# Altium PCB RUMBA_V2-bla.PcbDoc (part 2 of 2)
Units mm, origin at the board's own origin, x right, y up, seen from the top; angles counter-clockwise.
Board outline 145 x 75 mm, 2 copper layers (Top Layer, Bottom Layer); 189 components, 179 nets, 824 pads, 160 vias.
Unrouted connection lines stored in the file: 201.
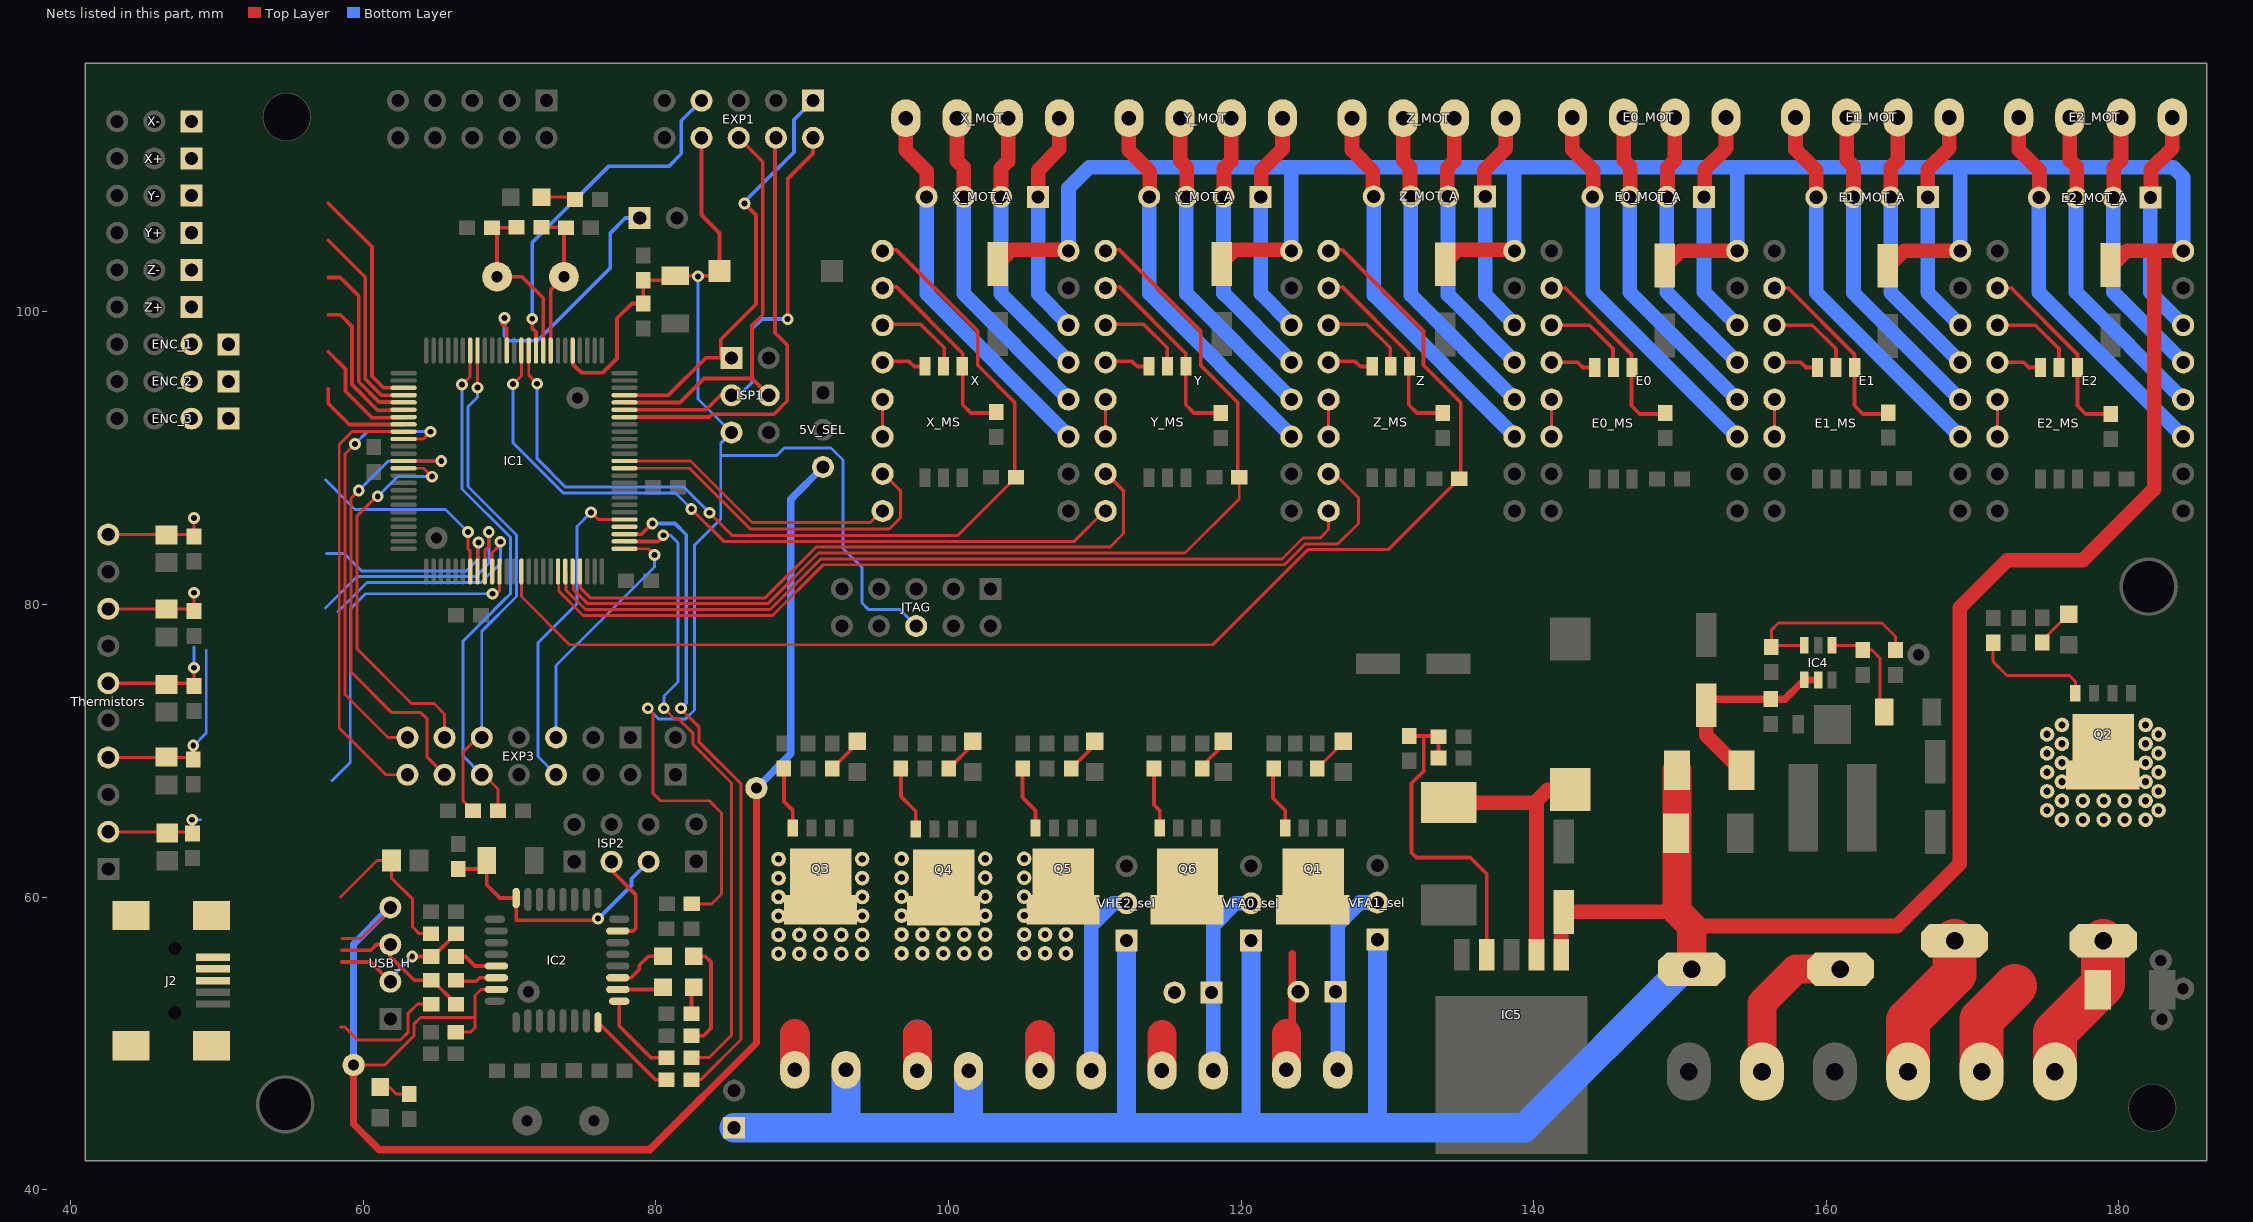
[diagram p2: the nets of this part, all layers, seen from the top]

## Via types
v1: diameter 0.8, hole 0.4, Top Layer to Bottom Layer, tented both sides, 160 vias

## Nets (pads, with @x,y where several pads share a name; then routed paths per layer and width w, separated by ;. In a path a pad name is that pad's centre, name@x,y a point inside that pad or via, vN(x,y) a via of type N, cw(c..) or ccw(c..) an arc to the next point about the centre after c; other vN are vias at no path point) (continued)
NetC18_2: C18.2 D4.2 IC4.1 | length 7.6
  Top Layer w0.2: IC4.1@160.39,77.219 162.163,77.219 C18.2@162.488,76.894 163.111,76.894 163.657,76.348 163.657,73.123 D4.2@164.165,72.615
NetC19_2: C19.2 IC1.33 R1.2 Y1.2 | length 10.5
  Top Layer w0.254: R1.2@72.178,105.782 C19.2@73.563,105.782 ; IC1.33@72.81,97.367 72.81,101.498 Y1.2@73.716,102.404 73.716,105.629 C19.2@73.563,105.782 ; C19.2@73.819,105.782 C19.2@73.563,105.782
NetC20_2: C20.2 IC1.34 R1.1 Y1.1 | length 12.4
  Top Layer w0.254: C20.2@68.799,105.752 C20.2@69.092,105.752 ; R1.1@70.448,105.752 C20.2@69.092,105.752 ; IC1.34@72.31,97.367 72.31,100.95 70.856,102.404 Y1.1@69.144,102.404 69.144,105.701 C20.2@69.092,105.752
NetC33_2: C33.2 IC5.4 R56.1 R57.1 | length 22.9
  Top Layer w0.254: R56.1@131.5,71.026 R57.1@133.433,71.026 ; 132.491,70.964 132.491,68.627 131.653,67.789 131.653,63.039 131.983,62.709 135.666,62.709 136.786,61.588 IC5.4@136.786,56.074 ; C33.2@133.496,69.516 R57.1@133.496,70.964
NetD8_2: D8.2 IC5.2 L4.1 | length 19.2
  Top Layer w0.254: 140.08,66.463 140.186,66.568
  Top Layer w1: D8.2@134.193,66.463 140.08,66.463 ; IC5.2@140.186,56.074 140.186,66.568 140.974,67.357 L4.1@142.498,67.357
NetE0_2: E0.2 E0_MS.1 R28.1 | length 13.4
  Top Layer w0.2: E0.2@141.211,101.636 142.153,101.636
  Top Layer w0.254: 142.153,101.636 146.688,97.102 146.688,96.204 146.688,93.596 147.252,93.032 R28.1@148.967,93.032
NetE0_3: E0.3 E0_MS.2 | length 6.2
  Top Layer w0.254: E0.3@141.211,99.096 143.804,99.096 145.418,97.483 E0_MS.2@145.418,96.204
NetE0_4: E0.4 E0_MS.3 | length 3.1
  Top Layer w0.254: E0.4@141.211,96.556 143.017,96.556 143.37,96.204 E0_MS.3@144.148,96.204
NetE0_5: E0.5 E0.6 | length 2.5
  Top Layer w0.2: E0.6@141.211,91.476 E0.5@141.211,94.016
NetE0_11: E0.11 E0_MOT.1 E0_MOT_A.4 | length 26.5
  Top Layer w1: E0_MOT.1@142.643,113.295 142.643,111.098 144.068,109.673 E0_MOT_A.4@144.068,107.921
  Bottom Layer w1: E0_MOT_A.4@144.022,107.87 144.022,101.365 E0.11@153.911,91.476
NetE0_12: E0.12 E0_MOT.2 E0_MOT_A.3 | length 22.5
  Top Layer w1: E0_MOT.2@146.143,113.295 146.143,110.392 146.608,109.927 E0_MOT_A.3@146.608,107.921
  Bottom Layer w1: E0_MOT_A.3@146.562,107.87 146.562,101.365 E0.12@153.911,94.016
NetE0_13: E0.13 E0_MOT.3 E0_MOT_A.2 | length 18.9
  Top Layer w1: E0_MOT_A.2@149.148,107.921 149.148,109.876 149.643,110.372 E0_MOT.3@149.643,113.295
  Bottom Layer w1: E0_MOT_A.2@149.102,107.87 149.102,101.365 E0.13@153.911,96.556
NetE0_14: E0.14 E0_MOT.4 E0_MOT_A.1 | length 15.7
  Top Layer w1: E0_MOT_A.1@151.688,107.921 151.688,109.749 153.143,111.205 E0_MOT.4@153.143,113.295
  Bottom Layer w1: E0_MOT_A.1@151.642,107.87 151.642,101.365 E0.14@153.911,99.096
NetE1_2: E1.2 E1_MS.1 R30.1 | length 13.4
  Top Layer w0.2: E1.2@156.451,101.636 157.393,101.636
  Top Layer w0.254: 157.393,101.636 161.928,97.102 161.928,96.204 161.928,93.596 162.492,93.032 R30.1@164.207,93.032
NetE1_3: E1.3 E1_MS.2 | length 6.2
  Top Layer w0.254: E1.3@156.451,99.096 159.044,99.096 160.658,97.483 E1_MS.2@160.658,96.204
NetE1_4: E1.4 E1_MS.3 | length 3.1
  Top Layer w0.254: E1.4@156.451,96.556 158.257,96.556 158.61,96.204 E1_MS.3@159.388,96.204
NetE1_5: E1.5 E1.6 | length 2.5
  Top Layer w0.2: E1.6@156.451,91.476 E1.5@156.451,94.016
NetE1_11: E1.11 E1_MOT.1 E1_MOT_A.4 | length 26.4
  Top Layer w1: E1_MOT.1@157.893,113.295 157.893,111.098 159.318,109.673 E1_MOT_A.4@159.318,107.921
  Bottom Layer w1: E1_MOT_A.4@159.313,107.844 159.313,101.314 E1.11@169.151,91.476
NetE1_12: E1.12 E1_MOT.2 E1_MOT_A.3 | length 22.4
  Top Layer w1: E1_MOT.2@161.393,113.295 161.393,110.392 161.858,109.927 E1_MOT_A.3@161.858,107.921
  Bottom Layer w1: E1_MOT_A.3@161.853,107.844 161.853,101.314 E1.12@169.151,94.016
NetE1_13: E1.13 E1_MOT.3 E1_MOT_A.2 | length 18.8
  Top Layer w1: E1_MOT_A.2@164.398,107.921 164.398,109.876 164.893,110.372 E1_MOT.3@164.893,113.295
  Bottom Layer w1: E1_MOT_A.2@164.393,107.844 164.393,101.314 E1.13@169.151,96.556
NetE1_14: E1.14 E1_MOT.4 E1_MOT_A.1 | length 15.6
  Top Layer w1: E1_MOT_A.1@166.938,107.921 166.938,109.749 168.393,111.205 E1_MOT.4@168.393,113.295
  Bottom Layer w1: E1_MOT_A.1@166.933,107.844 166.933,101.314 E1.14@169.151,99.096
NetE2_2: E2.2 E2_MS.1 R44.1 | length 13.4
  Top Layer w0.2: E2.2@171.691,101.636 172.633,101.636
  Top Layer w0.254: 172.633,101.636 177.168,97.102 E2_MS.1@177.168,96.204 177.168,93.596 177.732,93.032 R44.1@179.447,93.032
NetE2_3: E2.3 E2_MS.2 | length 6.2
  Top Layer w0.254: E2.3@171.691,99.096 174.284,99.096 175.898,97.483 E2_MS.2@175.898,96.204
NetE2_4: E2.4 E2_MS.3 | length 3.1
  Top Layer w0.254: E2.4@171.691,96.556 173.497,96.556 173.85,96.204 E2_MS.3@174.628,96.204
NetE2_5: E2.5 E2.6 | length 2.5
  Top Layer w0.2: E2.6@171.691,91.476 E2.5@171.691,94.016
NetE2_11: E2.11 E2_MOT.1 E2_MOT_A.4 | length 26.4
  Top Layer w1: E2_MOT.1@173.143,113.295 173.143,111.098 174.568,109.673 E2_MOT_A.4@174.568,107.921
  Bottom Layer w1: E2_MOT_A.4@174.528,107.819 174.528,101.339 E2.11@184.391,91.476
NetE2_12: E2.12 E2_MOT.2 E2_MOT_A.3 | length 22.4
  Top Layer w1: E2_MOT.2@176.643,113.295 176.643,110.392 177.108,109.927 E2_MOT_A.3@177.108,107.921
  Bottom Layer w1: E2_MOT_A.3@177.068,107.819 177.068,101.339 E2.12@184.391,94.016
NetE2_13: E2.13 E2_MOT.3 E2_MOT_A.2 | length 18.8
  Top Layer w1: E2_MOT_A.2@179.648,107.921 179.648,109.876 180.143,110.372 E2_MOT.3@180.143,113.295
  Bottom Layer w1: E2_MOT_A.2@179.608,107.819 179.608,101.339 E2.13@184.391,96.556
NetE2_14: E2.14 E2_MOT.4 E2_MOT_A.1 | length 15.6
  Top Layer w1: E2_MOT_A.1@182.188,107.921 182.188,109.749 183.643,111.205 E2_MOT.4@183.643,113.295
  Bottom Layer w1: E2_MOT_A.1@182.148,107.819 182.148,101.339 E2.14@184.391,99.096
NetF1_1: F1.1 HB-PWR.2 | length 10.3
  Top Layer w3: HB-PWR.2@165.583,48.078 165.583,51.58 168.762,54.758 F1.1@168.762,57.019
NetF2_1: F2.1 MAIN-PWR.2 | length 11
  Top Layer w2: MAIN-PWR.2@155.601,48.078 155.601,52.773 157.916,55.089 F2.1@160.964,55.089
NetFAN0_1: FAN0.1 FAN0_1.1 VFA0_sel.2 | length 13
  Bottom Layer w1: FAN0.1@118.089,48.154 118.089,58.06 119.613,59.584 VFA0_sel.2@120.502,59.584
NetFAN0_2: FAN0.2 FAN0_1.2 Q6.2 | length 2.5
  Top Layer w2: FAN0.2@114.589,48.154 114.589,50.623
NetFAN1_1: FAN1.1 FAN1_1.1 VFA1_sel.2 | length 13
  Bottom Layer w1: FAN1.1@126.598,48.205 126.598,58.111 128.122,59.635 VFA1_sel.2@129.011,59.635
NetFAN1_2: FAN1.2 FAN1_1.2 Q1.2 | length 8.1
  Top Layer w0.5: 123.098,50.674 123.493,51.069 123.493,56.155
  Top Layer w2: FAN1.2@123.098,48.205 123.098,50.674
NetHB-OUT_1: HB-OUT.1 pad.2@175.087,65.934 pad.2@175.087,67.236 pad.2@175.087,68.538 pad.2@175.087,69.84 pad.2@175.087,71.141 pad.2@176.103,65.299 pad.2@176.103,66.595 pad.2@176.103,67.89 pad.2@176.103,69.186 pad.2@176.103,70.481 pad.2@176.103,71.776 pad.2@177.531,65.299 pad.2@177.531,66.595 pad.2@178.96,65.299 pad.2@178.96,66.595 pad.2@180.389,65.299 pad.2@180.389,66.595 pad.2@181.818,65.299 pad.2@181.818,66.595 pad.2@181.818,67.89 pad.2@181.818,69.186 pad.2@181.818,70.481 pad.2@181.818,71.776 pad.2@182.707,65.934 pad.2@182.707,67.236 pad.2@182.707,68.538 pad.2@182.707,69.84 pad.2@182.707,71.141 Q2.2 | length 6.8
  Top Layer w3: HB-OUT.1@170.616,48.078 170.616,51.634 172.902,53.92
NetHE0_2: HE0.2 pad.2@88.384,56.13 pad.2@88.384,57.425 pad.2@88.384,58.721 pad.2@88.384,60.016 pad.2@88.384,61.312 pad.2@88.384,62.607 pad.2@89.812,56.13 pad.2@89.812,57.425 pad.2@91.241,56.13 pad.2@91.241,57.425 pad.2@92.67,56.13 pad.2@92.67,57.425 pad.2@94.099,56.13 pad.2@94.099,57.425 pad.2@94.099,58.721 pad.2@94.099,60.016 pad.2@94.099,61.312 pad.2@94.099,62.607 Q3.2 | length 4.9
  Top Layer w2: HE0.2@89.494,48.205 89.494,50.674
  Bottom Layer w2: HE0.2@89.494,48.205 89.494,50.613
NetHE1_2: HE1.2 pad.2@96.791,56.155 pad.2@96.791,57.451 pad.2@96.791,58.746 pad.2@96.791,60.042 pad.2@96.791,61.337 pad.2@96.791,62.632 pad.2@98.22,56.155 pad.2@98.22,57.451 pad.2@99.649,56.155 pad.2@99.649,57.451 pad.2@101.077,56.155 pad.2@101.077,57.451 pad.2@102.506,56.155 pad.2@102.506,57.451 pad.2@102.506,58.746 pad.2@102.506,60.042 pad.2@102.506,61.337 pad.2@102.506,62.632 Q4.2 | length 5
  Top Layer w2: HE1.2@97.876,48.129 97.876,50.598
  Bottom Layer w2: HE1.2@97.876,48.129 97.876,50.638
NetHE2_1: HE2.1 VHE2_sel.2 | length 13
  Bottom Layer w1: HE2.1@109.758,48.154 109.758,58.06 111.282,59.584 VHE2_sel.2@112.171,59.584
NetHE2_2: HE2.2 pad.2@105.173,56.155 pad.2@105.173,57.451 pad.2@105.173,58.746 pad.2@105.173,60.042 pad.2@105.173,61.337 pad.2@105.173,62.632 pad.2@106.602,56.155 pad.2@106.602,57.451 pad.2@108.031,56.155 pad.2@108.031,57.451 Q5.2 | length 4.9
  Top Layer w2: HE2.2@106.258,48.154 106.258,50.623
  Bottom Layer w2: HE2.2@106.258,48.154 106.258,50.573
NetIC2_8: IC2.8 R17.1 | length 6.3
  Top Layer w0.254: IC2.8@76.048,51.447 76.055,51.447 79.97,47.531 R17.1@80.734,47.531
NetIC2_9: IC2.9 R18.1 | length 5.8
  Top Layer w0.254: IC2.9@77.498,52.897 77.498,51.204 79.671,49.031 R18.1@80.734,49.031
NetIC2_10: IC2.10 RX.2 | length 3.2
  Top Layer w0.254: IC2.10@77.398,53.697 80.329,53.697 RX.2@80.489,53.857
NetIC2_11: IC2.11 TX.2 | length 3.9
  Top Layer w0.254: IC2.11@77.398,54.497 78.305,54.497 78.871,55.063 78.871,55.343 79.494,55.966 TX.2@80.489,55.966
NetIC2_29: IC2.29 R8.1 | length 3
  Top Layer w0.254: R8.1@66.348,55.947 66.99,55.947 67.64,55.297 IC2.29@69.098,55.297
NetIC2_30: IC2.30 R7.1 | length 2.9
  Top Layer w0.254: R7.1@66.348,54.324 66.421,54.25 67.721,54.25 67.967,54.497 IC2.30@69.098,54.497
NetIC4_3: IC4.3 R5.1 R6.2 | length 13.4
  Top Layer w0.2: R6.2@156.24,77.097 156.24,78.253 156.722,78.736 163.809,78.736 164.723,77.822 R5.1@164.723,76.894 ; R6.2@156.362,77.219 IC4.3@158.49,77.219
  Top Layer w0.5: R6.2@156.24,77.097 R6.2@156.362,77.219
NetJ2_0: J2.0 L1.1 Z1.2 Z2.2 | length 19.4
  Top Layer w0.2: 58.453,51.121 58.734,51.121 59.618,50.237 62.539,50.237 63.073,50.771 63.073,52.066 63.703,52.697 Z1.2@64.648,52.697 ; 58.453,60.021 60.937,62.505 L1.1@61.919,62.505 61.919,61.322 63.377,59.864 63.377,57.959 63.828,57.508 Z2.2@64.638,57.508
NetJ2_2: J2.2 R7.2 USB_H.3 Z1.1 | length 10.1
  Top Layer w0.254: 58.553,56.371 60.52,56.371 60.914,56.765 USB_H.3@61.853,56.765 61.853,55.952 63.482,54.324 R7.2@64.648,54.324 64.721,54.324 Z1.1@66.348,52.697
NetJ2_3: J2.3 R8.2 USB_H.2 Z2.1 | length 9.8
  Top Layer w0.254: 58.553,55.571 60.507,55.571 USB_H.2@61.853,54.225 ; v1(63.346,55.947) R8.2@64.648,55.947 64.776,55.947 Z2.1@66.338,57.508
  Bottom Layer w0.254: USB_H.2@61.853,54.225 61.853,54.454 v1(63.346,55.947)
NetLD2_1: LD2.1 R33.2 | length 2.7
  Top Layer w0.2: R33.2@174.756,77.403 174.756,77.542 LD2.1@176.56,79.346
NetLD3_1: LD3.1 R36.2 | length 2.6
  Top Layer w0.254: R36.2@92.053,68.793 93.756,70.496 LD3.1@93.756,70.659
NetLD4_1: LD4.1 R39.2 | length 2.5
  Top Layer w0.254: R39.2@100.029,68.793 101.658,70.422 LD4.1@101.658,70.659
NetLD5_1: LD5.1 R50.2 | length 2.5
  Top Layer w0.254: R50.2@108.386,68.793 109.99,70.397 LD5.1@109.99,70.659
NetLD6_1: LD6.1 R53.2 | length 2.5
  Top Layer w0.254: R53.2@117.352,68.793 117.352,68.98 118.778,70.406 LD6.1@118.778,70.659
NetLD7_1: LD7.1 R55.2 | length 2.6
  Top Layer w0.2: R55.2@125.201,68.793 LD7.1@126.979,70.571
  Top Layer w0.5: LD7.1@126.979,70.571 LD7.1@126.979,70.659
NetLED1_1: LED1.1 R13.1 | length 2.1
  Top Layer w0.2: LED1.1@72.183,107.844 R13.1@74.33,107.844
NetPower_1: Power.1 R4.1 | length 2.2
  Top Layer w0.2: Power.1@61.168,47.029 61.785,47.029 62.273,46.541 R4.1@63.149,46.541
NetQ1_1: Q1.1 R46.2 | length 4.5
  Top Layer w0.254: R46.2@122.404,68.793 122.178,68.568 122.178,66.77 123.017,65.932 Q1.1@123.017,64.727
NetQ2_1: Q2.1 R31.2 | length 8.3
  Top Layer w0.2: R31.2@171.404,77.392 171.404,76.094 172.343,75.155 176.611,75.155 177.017,74.748 Q2.1@177.017,73.935
NetQ3_1: Q3.1 R34.2 | length 4.3
  Top Layer w0.254: R34.2@88.751,68.793 88.751,66.545 89.364,65.932 Q3.1@89.364,64.727
NetQ4_1: Q4.1 R37.2 | length 4.7
  Top Layer w0.254: R37.2@97.156,68.73 96.753,68.327 96.753,66.885 97.769,65.869 Q4.1@97.769,64.664
NetQ5_1: Q5.1 R48.2 | length 4.5
  Top Layer w0.254: R48.2@105.336,68.793 105.059,68.516 105.059,66.822 105.949,65.932 Q5.1@105.949,64.727
NetQ6_1: Q6.1 R51.2 | length 4.3
  Top Layer w0.254: R51.2@113.819,68.793 114.05,68.561 114.05,66.313 114.432,65.932 Q6.1@114.432,64.727
NetR15_2: R15.2 TX.1 | length 7.4
  Top Layer w0.254: R15.2@82.434,50.531 83.254,50.531 83.774,51.05 83.774,55.571 83.379,55.966 TX.1@82.589,55.966
NetR16_2: R16.2 RX.1 | length 1.7
  Top Layer w0.254: R16.2@82.434,52.031 RX.1@82.434,53.702
NetR22_1: R22.1 X.2 X_MS.1 | length 13.4
  Top Layer w0.2: X.2@95.499,101.705 96.442,101.705
  Top Layer w0.254: 96.442,101.705 100.976,97.17 100.976,96.272 100.976,93.665 101.541,93.101 R22.1@103.255,93.101
NetR24_1: R24.1 Y.2 Y_MS.1 | length 13.4
  Top Layer w0.2: Y.2@110.739,101.705 111.682,101.705
  Top Layer w0.254: 111.682,101.705 116.216,97.17 116.216,96.272 116.216,93.665 116.781,93.101 R24.1@118.495,93.101
NetR26_1: R26.1 Z.2 Z_MS.1 | length 13.4
  Top Layer w0.2: Z.2@125.979,101.705 126.922,101.705
  Top Layer w0.254: 126.922,101.705 131.456,97.17 131.456,96.272 131.456,93.665 132.021,93.101 R26.1@133.735,93.101
NetX_3: X.3 X_MS.2 | length 6.2
  Top Layer w0.254: X.3@95.499,99.165 98.093,99.165 99.706,97.551 X_MS.2@99.706,96.272
NetX_4: X.4 X_MS.3 | length 3.1
  Top Layer w0.254: X.4@95.499,96.625 97.305,96.625 97.658,96.272 X_MS.3@98.436,96.272
NetX_5: X.5 X.6 | length 2.5
  Top Layer w0.2: X.6@95.499,91.545 X.5@95.499,94.085
NetX_11: X.11 X_MOT.1 X_MOT_A.4 | length 26.3
  Top Layer w1: X_MOT.1@97.081,113.244 97.081,111.047 98.506,109.622 X_MOT_A.4@98.506,107.87
  Bottom Layer w1: X_MOT_A.4@98.506,107.87 98.506,101.238 X.11@108.199,91.545
NetX_12: X.12 X_MOT.2 X_MOT_A.3 | length 22.3
  Top Layer w1: X_MOT.2@100.581,113.244 100.581,110.341 101.046,109.876 X_MOT_A.3@101.046,107.87
  Bottom Layer w1: X_MOT_A.3@101.046,107.87 101.046,101.238 X.12@108.199,94.085
NetX_13: X.13 X_MOT.3 X_MOT_A.2 | length 18.7
  Top Layer w1: X_MOT_A.2@103.586,107.87 103.586,109.826 104.081,110.321 X_MOT.3@104.081,113.244
  Bottom Layer w1: X_MOT_A.2@103.586,107.87 103.586,101.238 X.13@108.199,96.625
NetX_14: X.14 X_MOT.4 X_MOT_A.1 | length 15.5
  Top Layer w1: X_MOT_A.1@106.126,107.87 106.126,109.699 107.581,111.154 X_MOT.4@107.581,113.244
  Bottom Layer w1: X_MOT_A.1@106.126,107.87 106.126,101.238 X.14@108.199,99.165
NetY_3: Y.3 Y_MS.2 | length 6.2
  Top Layer w0.254: Y.3@110.739,99.165 113.333,99.165 114.946,97.551 Y_MS.2@114.946,96.272
NetY_4: Y.4 Y_MS.3 | length 3.1
  Top Layer w0.254: Y.4@110.739,96.625 112.545,96.625 112.898,96.272 Y_MS.3@113.676,96.272
NetY_5: Y.5 Y.6 | length 2.5
  Top Layer w0.2: Y.6@110.739,91.545 Y.5@110.739,94.085
NetY_11: Y.11 Y_MOT.1 Y_MOT_A.4 | length 28.1
  Top Layer w1: Y_MOT.1@112.331,113.244 112.331,111.047 113.756,109.622 ; 113.756,109.622 113.756,107.87 113.756,109.622
  Bottom Layer w1: Y_MOT_A.4@113.72,107.87 113.72,101.264 Y.11@123.439,91.545
NetY_12: Y.12 Y_MOT.2 Y_MOT_A.3 | length 24.3
  Top Layer w1: Y_MOT.2@115.831,113.244 115.831,110.341 116.296,109.876 ; 116.296,109.876 116.296,107.87 116.296,109.876
  Bottom Layer w1: Y_MOT_A.3@116.26,107.87 116.26,101.264 Y.12@123.439,94.085
NetY_13: Y.13 Y_MOT.3 Y_MOT_A.2 | length 20.7
  Top Layer w1: Y_MOT.3@119.331,113.244 119.331,110.321 118.836,109.826 ; 118.836,109.826 118.836,107.87 118.836,109.826
  Bottom Layer w1: Y_MOT_A.2@118.8,107.87 118.8,101.264 Y.13@123.439,96.625
NetY_14: Y.14 Y_MOT.4 Y_MOT_A.1 | length 17.4
  Top Layer w1: Y_MOT.4@122.831,113.244 122.831,111.154 121.376,109.699 ; 121.376,109.699 121.376,107.87 121.376,109.699
  Bottom Layer w1: Y_MOT_A.1@121.34,107.87 121.34,101.264 Y.14@123.439,99.165
NetZ_3: Z.3 Z_MS.2 | length 6.2
  Top Layer w0.254: Z.3@125.979,99.165 128.573,99.165 130.186,97.551 Z_MS.2@130.186,96.272
NetZ_4: Z.4 Z_MS.3 | length 3.1
  Top Layer w0.254: Z.4@125.979,96.625 127.785,96.625 128.138,96.272 Z_MS.3@128.916,96.272
NetZ_5: Z.5 Z.6 | length 2.5
  Top Layer w0.2: Z.6@125.979,91.545 Z.5@125.979,94.085
NetZ_11: Z.11 Z_MOT.1 Z_MOT_A.4 | length 28.1
  Top Layer w1: Z_MOT.1@127.581,113.244 127.581,111.047 129.006,109.622 ; 129.006,109.622 129.006,107.87 129.006,107.895 129.006,109.622
  Bottom Layer w1: Z_MOT_A.4@129.062,107.895 129.062,101.162 Z.11@138.679,91.545
NetZ_12: Z.12 Z_MOT.2 Z_MOT_A.3 | length 24.3
  Top Layer w1: Z_MOT.2@131.081,113.244 131.081,110.341 131.546,109.876 ; 131.546,109.876 131.546,107.87 131.546,107.895 131.546,109.876
  Bottom Layer w1: Z_MOT_A.3@131.602,107.895 131.602,101.162 Z.12@138.679,94.085
NetZ_13: Z.13 Z_MOT.3 Z_MOT_A.2 | length 20.7
  Top Layer w1: Z_MOT.3@134.581,113.244 134.581,110.321 134.086,109.826 ; 134.086,109.826 134.086,107.87 134.086,107.895 134.086,109.826
  Bottom Layer w1: Z_MOT_A.2@134.142,107.895 134.142,101.162 Z.13@138.679,96.625
NetZ_14: Z.14 Z_MOT.4 Z_MOT_A.1 | length 17.4
  Top Layer w1: Z_MOT.4@138.081,113.244 138.081,111.154 136.626,109.699 ; 136.626,109.699 136.626,107.87 136.626,107.895 136.626,109.699
  Bottom Layer w1: Z_MOT_A.1@136.682,107.895 136.682,101.162 Z.14@138.679,99.165
PB1_(SCK): EXP1.2 IC1.20 ISP1.3 | length 28.2
  Top Layer w0.254: IC1.20@77.86,93.317 83.419,93.317 ISP1.3@84.434,94.332 ; v1(89.006,99.513) 89.006,109.089 90.743,110.826 EXP1.2@90.743,111.904
  Bottom Layer w0.254: ISP1.3@85.171,94.306 85.704,94.306 86.593,95.195 86.593,98.853 87.253,99.513 v1(89.006,99.513)
PB2_(MOSI): EXP1.6 IC1.21 ISP1.4 | length 28.4
  Top Layer w0.254: IC1.21@77.86,93.817 81.659,93.817 83.291,95.449 86.568,95.449 ; EXP1.6@85.663,111.904 87.304,110.262 87.304,99.818 86.568,99.081 86.568,95.449 ; ISP1.4@87.711,94.306 86.568,95.449
PB3_(MISO): EXP1.1 IC1.22 ISP1.1 | length 28.5
  Top Layer w0.254: IC1.22@77.86,94.317 80.863,94.317 83.418,96.872 84.434,96.872 84.434,98.116 86.847,100.529 86.847,106.625 v1(86.06,107.413)
  Bottom Layer w0.254: v1(86.06,107.413) 86.06,107.54 89.438,110.918 89.438,113.139 EXP1.1@90.743,114.444
PC6: EXP3.14 IC1.59 | length 30.5
  Top Layer w0.2: 58.983,91.563 58.729,91.309 ; IC1.59@62.76,91.817 59.237,91.817 58.729,91.309 ; EXP3.14@63.022,68.373 61.549,68.373 58.36,71.561 58.36,90.94 58.729,91.309
PC7: EXP3.13 IC1.60 | length 30.4
  Top Layer w0.2: v1(59.44,90.979) 58.76,90.298 58.76,77.237 58.76,73.854 61.701,70.913 EXP3.13@63.022,70.913 ; IC1.60@62.76,91.317 64.097,91.317 v1(64.597,91.817)
  Bottom Layer w0.2: v1(59.44,90.979) 60.279,91.817 v1(64.597,91.817)
PJ0: EXP3.12 IC1.63 | length 33.3
  Top Layer w0.2: v1(59.694,87.804) 59.16,87.269 59.16,75.41 61.955,72.615 62.59,72.615 ; IC1.63@62.76,89.817 v1(65.327,89.817) ; 63.377,72.615 62.59,72.615 ; EXP3.12@65.562,68.373 64.368,69.567 64.368,72.183 63.936,72.615 62.59,72.615
  Bottom Layer w0.2: v1(59.694,87.804) 61.708,89.817 v1(65.327,89.817)
PJ1: EXP3.11 IC1.64 | length 27.1
  Top Layer w0.2: v1(60.99,87.397) 60.99,87.169 60.685,87.169 59.56,86.044 59.56,76.991 63.303,73.248 64.827,73.248 65.562,72.513 EXP3.11@65.562,70.913 ; IC1.64@62.76,89.317 64.125,89.317 v1(64.698,88.744)
  Bottom Layer w0.2: v1(60.99,87.397) 62.336,88.744 v1(64.698,88.744)
PS_ON: IC1.39 PS_ON.1 | length 17.9
  Top Layer w0.254: v1(69.651,99.586) 69.489,99.424 69.489,99.206 69.81,98.885 IC1.39@69.81,97.367
  Bottom Layer w0.254: v1(69.651,99.586) 69.651,98.37 69.981,98.04 71.912,98.04 76.89,103.018 76.89,105.406 77.906,106.422 PS_ON.1@78.897,106.422
PWM_1: EXP3.5 IC1.1 | length 17.5
  Top Layer w0.2: IC1.1@77.86,83.817 79.48,83.817 v1(79.913,83.384)
  Bottom Layer w0.2: EXP3.5@73.182,70.913 73.182,75.84 79.913,82.571 v1(79.913,83.384)
PWM_2: EXP3.6 IC1.5 | length 22.4
  Top Layer w0.2: v1(75.569,86.305) 76.058,85.817 IC1.5@77.86,85.817
  Bottom Layer w0.2: EXP3.6@73.182,68.373 71.937,69.617 71.937,77.394 74.604,80.061 74.604,85.34 v1(75.569,86.305)
RESET: C8.2 C16.1 D2.1 EXP1.8 IC1.30 ISP1.5 JTAG.6 R11.1 Reset.2 | length 104.6
  Top Layer w0.2: v1(79.456,72.919) 79.811,72.564 79.811,67.103 80.319,66.595 83.647,66.595 84.485,65.757 84.485,60.219 83.811,59.546 C16.1@82.45,59.546
  Top Layer w0.254: IC1.30@74.31,97.367 74.333,97.344 74.333,96.419 74.612,96.14 74.625,96.14 74.909,95.856 76.382,95.856 77.347,96.821 77.347,99.564 78.362,100.579 R11.1@79.132,100.579 C8.2@79.132,102.162 ; C8.2@79.125,102.168 81.026,102.168 D2.1@81.324,102.467 Reset.2@84.307,102.467 ; EXP1.8@83.123,111.904 83.123,106.627 84.343,105.406 Reset.2@84.343,102.79
  Bottom Layer w0.2: v1(79.456,72.919) 80.181,72.194 82.043,72.194 82.64,72.791 82.64,74.164 ; 82.64,73.648 82.64,74.164 ; v1(82.885,102.434) 82.885,94.052 ISP1.5@85.171,91.766 84.434,91.03 84.434,90.191 ; JTAG.6@97.794,78.533 96.651,79.676 94.518,79.676 94.086,80.108 94.086,82.546 92.791,83.841 92.791,89.887 91.978,90.699 88.777,90.699 88.269,90.191 84.434,90.191 ; 82.64,74.164 82.64,84.054 84.434,85.848 84.434,90.191
RESET2: D3.1 IC2.24 ISP2.5 R12.1 | length 17.9
  Top Layer w0.254: R12.1@66.502,61.935 D3.1@67.862,61.935 ; D3.1@68.433,62.505 68.433,60.854 69.34,59.947 IC2.24@70.448,59.947 70.448,58.432 75.941,58.432 v1(76.052,58.543)
  Bottom Layer w0.254: v1(76.052,58.543) 76.077,58.543 78.338,60.804 78.338,61.261 ISP2.5@79.506,62.429
SCK2: IC2.15 ISP2.3 | length 6.5
  Top Layer w0.254: ISP2.3@76.966,62.429 76.966,61.845 78.617,60.194 78.617,57.857 78.457,57.697 IC2.15@77.398,57.697
SCL: ENC_1.1 ENC_2.1 ENC_3.1 EXP3.9 IC1.43 R3.1 | length 35.1
  Top Layer w0.2: R3.1@67.504,65.909 66.832,66.581 66.832,69.922 67.822,70.913 EXP3.9@68.102,70.913 ; v1@67.797,94.814 v1(67.81,94.827) IC1.43@67.81,97.367
  Bottom Layer w0.2: v1(67.81,94.827) 67.81,94.173 67.156,93.519 67.156,88.071 70.472,84.755 70.472,80.547 68.102,78.177 EXP3.9@68.102,70.862
SD_CSEL: EXP1.4 IC1.19 | length 29.9
  Top Layer w0.254: IC1.19@77.86,92.817 83.656,92.817 83.85,93.011 87.66,93.011 88.066,93.011 88.981,93.925 88.981,97.735 88.142,98.573 88.142,111.844 EXP1.4@88.203,111.904
SD_DET: EXP1.7 IC1.35 | length 24.4
  Top Layer w0.254: v1(71.556,99.539) 71.556,98.878 71.81,98.624 IC1.35@71.81,97.367
  Bottom Layer w0.254: v1(71.556,99.539) 71.556,104.746 76.763,109.953 80.878,109.953 81.742,110.816 81.742,113.063 EXP1.7@83.123,114.444
SDA: ENC_1.2 ENC_2.2 ENC_3.2 EXP3.10 IC1.44 R2.1 | length 36.4
  Top Layer w0.2: v1(66.756,95.043) 67.31,95.597 IC1.44@67.31,97.367 ; EXP3.10@68.102,68.373 68.229,68.373 69.208,67.394 R2.1@69.208,65.909
  Bottom Layer w0.2: v1(66.756,95.043) 66.756,87.905 70.058,84.603 ; 67.899,78.584 68.165,78.85 ; EXP3.10@68.102,68.373 66.832,69.643 66.832,77.517 68.165,78.85 ; 69.219,79.904 69.608,80.293 ; 70.058,84.603 70.072,84.589 70.072,84.009 70.058,83.994 70.058,80.743 69.608,80.293 ; 68.165,78.85 69.608,80.293
THERM0: C29.2 IC1.82 R43.2 Thermistors.10 | length 21.6
  Top Layer w0.2: Thermistors.10@42.557,84.804 R43.2@48.5,84.804 ; C29.2@46.361,84.956 C29.2@46.554,84.763 C29.2@46.654,84.663 ; R43.2@48.434,84.663 v1(48.434,85.919) ; v1(67.162,84.959) 67.162,83.816 67.31,83.668 IC1.82@67.31,82.267
  Bottom Layer w0.2: v1@48.434,85.845 v1(48.434,85.919) ; 57.434,88.515 59.44,86.508 65.613,86.508 v1(67.162,84.959)
THERM1: C28.2 IC1.83 R42.2 Thermistors.8 | length 21.9
  Top Layer w0.2: Thermistors.8@42.575,79.71 48.281,79.71 R42.2@48.434,79.558 v1(48.434,80.814) ; IC1.83@67.81,82.267 v1@67.81,84.451
  Bottom Layer w0.2: 57.485,83.484 58.706,83.484 59.879,82.311 67.06,82.311 67.848,83.098 67.848,84.212 v1(67.883,84.247) ; v1@67.608,84.287 v1@67.772,84.451
THERM2: C27.2 IC1.84 R41.2 Thermistors.6 | length 26
  Top Layer w0.2: R41.2@48.434,74.427 v1(48.434,75.683) ; IC1.84@68.31,82.267 68.31,83.684 68.584,83.958 v1(68.584,84.959)
  Top Layer w0.254: Thermistors.6@42.575,74.63 48.231,74.63 R41.2@48.434,74.427
  Bottom Layer w0.2: v1(48.434,75.683) 48.434,77.095 ; 57.421,79.765 59.567,81.911 67.695,81.911 68.584,82.8 v1(68.584,84.959)
THERM3: C26.2 IC1.85 R40.2 Thermistors.4 | length 29.6
  Top Layer w0.2: Thermistors.4@42.575,69.55 48.256,69.55 R40.2@48.383,69.423 v1(48.383,70.376) ; IC1.85@68.81,82.267 68.81,83.534 v1@69.296,84.019
  Bottom Layer w0.2: v1(48.383,70.376) 48.434,70.376 49.272,71.215 49.272,76.853 ; 58.272,79.523 60.25,81.501 68.048,81.501 69.372,82.825 v1(69.372,84.299)
THERM4: C9.2 IC1.86 R54.2 Thermistors.2 | length 31
  Top Layer w0.2: Thermistors.2@42.575,64.47 48.231,64.47 R54.2@48.332,64.368 ; v1(68.838,80.743) 68.838,80.463 69.31,80.935 ; 69.31,80.986 IC1.86@69.31,82.267
  Bottom Layer w0.2: v1(48.307,65.296) 48.866,65.296 ; 57.866,67.966 59.11,69.211 59.11,79.708 60.145,80.743 v1(68.838,80.743)
"USB RXD": IC1.2 R18.2 | length 43.4
  Top Layer w0.2: v1@80.548,72.792 v1(80.548,72.919) 81.248,72.219 81.527,72.219 82.535,71.211 82.535,70.449 85.171,67.814 85.171,50.567 83.634,49.031 R18.2@82.434,49.031
  Top Layer w0.254: IC1.2@77.86,84.317 80.16,84.317 v1@80.37,84.527
  Bottom Layer w0.2: v1(80.513,84.74) 80.996,84.74 81.513,84.222 81.513,74.715 80.548,73.75 v1(80.548,72.919)
USB_TXD: IC1.3 R17.2 | length 45.7
  Top Layer w0.2: v1@81.716,72.894 v1@81.691,72.894 ; v1(81.716,72.919) v1@81.691,72.894 ; R17.2@82.434,47.531 83.074,47.531 85.81,50.267 85.81,67.758 82.935,70.633 82.935,71.649 v1@81.691,72.894
  Top Layer w0.254: IC1.3@77.86,84.817 79.034,84.817 v1(79.76,85.543)
  Bottom Layer w0.254: v1(79.76,85.543) 81.31,85.543 82.072,84.781 82.072,73.275 v1(81.716,72.919)
USB_XCK: IC1.4
USBVCC: 5V_SEL.3 C11.2 IC2.31 J2.1 pad.0 pad.1 USB_H.4 | length 108
  Top Layer w0.2: 58.553,57.171 59.847,57.171 61.853,59.178 USB_H.4@61.853,59.305 ; pad.0@59.339,48.535 61.472,48.535 63.479,50.542 63.479,51.355 63.911,51.787 67.645,51.787 ; C11.2@66.325,50.778 67.348,50.778 67.645,51.075 67.645,51.787 ; IC2.31@69.098,53.697 68.056,53.697 67.645,53.285 67.645,51.787
  Top Layer w0.5: pad.0@59.339,48.535 59.339,44.497 61.091,42.744 79.583,42.744 86.872,50.034 pad.1@86.872,67.458
  Bottom Layer w0.5: pad.0@59.339,48.535 59.339,56.79 USB_H.4@61.853,59.305 ; pad.1@86.872,67.458 89.209,69.795 89.209,87.194 5V_SEL.3@91.419,89.404
VIN: C1.1 C3.2 D1.2 IC4.4 IC4.5 | length 13.2
  Top Layer w0.5: C1.1@152.212,73.541 C3.2@156.189,73.541 157.166,73.541 158.469,74.844 IC4.5@159.44,74.844
  Top Layer w1: C1.1@151.795,73.123 151.795,71.081 D1.2@154.198,68.678
VIN1: C21.1 C22.1 C23.1 C24.1 C25.1 C30.1 C31.1 D1.1 D6.2 E0.16 E1.16 E2.16 F2.2 HE0.1 HE1.1 IC5.1 PWR.1 VFA0_sel.1 VFA1_sel.1 VHE2_sel.1 X.16 Y.16 Z.16 | length 350.7
  Top Layer w1: C21.1@103.374,103.285 104.334,104.245 X.16@108.199,104.245 ; C22.1@118.614,103.285 119.574,104.245 Y.16@123.439,104.245 ; C23.1@133.854,103.285 134.814,104.245 Z.16@138.679,104.245 ; IC5.1@141.886,56.074 141.886,58.846 C31.1@142.041,59.001 149.758,59.001 149.798,59.041 ; C24.1@149.085,103.216 150.045,104.176 E0.16@153.911,104.176 ; 150.804,58.035 164.85,58.035 169.118,62.302 169.118,79.777 172.381,83.041 177.538,83.041 182.402,87.905 182.402,104.176 ; C25.1@164.325,103.216 165.285,104.176 E1.16@169.151,104.176 ; C30.1@179.565,103.216 180.525,104.176 182.402,104.176 ; E2.16@184.391,104.176 182.402,104.176
  Top Layer w2: D1.1@149.798,68.678 149.798,59.041 150.804,58.035 F2.2@150.804,55.089
  Bottom Layer w1: X.16@108.199,104.176 108.199,108.47 109.631,109.902 138.815,109.902 ; Y.16@123.439,104.176 123.439,109.791 ; Z.16@138.679,104.176 138.679,109.766 138.815,109.902 ; E0.16@153.911,104.176 153.911,109.783 154.03,109.902 ; E1.16@169.151,104.176 169.151,109.783 ; E2.16@184.391,104.176 184.391,109.208 183.697,109.902 154.03,109.902 ; 138.815,109.902 154.03,109.902
  Bottom Layer w1.3: 112.171,44.344 VHE2_sel.1@112.171,57.044 ; 120.68,44.497 VFA0_sel.1@120.68,57.044 ; 129.316,44.294 VFA1_sel.1@129.316,57.095
  Bottom Layer w2: PWR.1@85.348,44.243 120.426,44.243 ; 92.994,44.878 HE0.1@92.994,48.205 ; 101.376,44.929 HE1.1@101.376,48.129 ; 120.68,44.497 120.426,44.243 ; 129.316,44.294 129.367,44.243 ; F2.2@150.804,55.089 150.195,55.089 139.349,44.243 129.367,44.243 ; 120.426,44.243 129.367,44.243
VIN2: D7.2 F1.2 HB-OUT.2 | length 10.3
  Top Layer w3: HB-OUT.2@175.616,48.078 175.616,50.757 178.922,54.063 F1.2@178.922,57.019
X-DIR: IC1.13 X.8 | length 19.7
  Top Layer w0.2: IC1.13@77.86,89.817 82.368,89.817 86.573,85.611 94.646,85.611 X.8@95.499,86.465
X-EN: IC1.36 R21.2 X.1 | length 64.2
  Top Layer w0.2: IC1.36@71.31,97.367 71.31,95.67 v1(71.886,95.094) ; v1(83.672,86.28) 85.221,84.73 100.628,84.73 R21.2@104.606,88.708
  Top Layer w0.254: X.1@95.499,104.245 96.442,104.245 101.994,98.693 101.994,96.356 104.534,93.816 104.534,88.877 R21.2@104.31,88.653
  Bottom Layer w0.2: v1(71.886,95.094) 71.886,89.97 73.83,88.026 81.925,88.026 v1(83.672,86.28)
  Bottom Layer w0.254: v1(83.672,86.28) v1@83.672,86.318
X-MAX: IC1.54 X+.1 | length 13.6
  Top Layer w0.254: 57.612,104.898 60.142,102.368 60.142,95.414 61.243,94.312 62.755,94.312 IC1.54@62.76,94.317 IC1.54@62.737,94.34
X-MIN: IC1.53 X-.1 | length 15.6
  Top Layer w0.254: 57.612,107.438 60.596,104.454 60.596,95.602 61.381,94.817 IC1.53@62.76,94.817
X-STEP: IC1.12 X.7 | length 24.5
  Top Layer w0.2: IC1.12@77.86,89.317 82.302,89.317 86.462,85.157 95.935,85.157 96.717,85.939 96.717,87.786 X.7@95.499,89.005
Y-DIR: IC1.37 Y.8 | length 51
  Top Layer w0.2: v1(70.235,95.068) 70.81,95.643 IC1.37@70.81,97.367 ; v1(82.428,86.534) v1@82.58,86.382 ; v1@82.478,86.585 82.58,86.483 v1@82.58,86.382 ; Y.8@110.739,86.465 108.598,84.324 84.638,84.324 v1@82.58,86.382
  Bottom Layer w0.2: v1(70.235,95.068) 70.235,91.055 73.664,87.626 81.336,87.626 v1(82.428,86.534)
Y-EN: IC1.96 R23.2 Y.1 | length 71.6
  Top Layer w0.2: IC1.96@74.31,82.267 74.36,82.217 74.36,81.053 75.35,80.063 87.648,80.063 91.108,83.524 116.171,83.524 119.871,87.224 R23.2@119.871,88.708
  Top Layer w0.254: Y.1@110.739,104.245 111.682,104.245 117.234,98.693 117.234,96.356 119.774,93.816 119.774,88.877 R23.2@119.55,88.653
Y-MAX: IC1.56 Y+.1 | length 10.2
  Top Layer w0.254: 57.612,99.818 58.424,99.818 59.234,99.008 59.234,95.037 60.982,93.289 61.808,93.289 61.812,93.294 62.737,93.294 IC1.56@62.76,93.317 IC1.56@62.737,93.34
Y-MIN: IC1.55 Y-.1 | length 12.1
  Top Layer w0.254: 57.612,102.358 58.424,102.358 59.688,101.094 59.688,95.225 61.073,93.84 62.737,93.84 IC1.55@62.76,93.817
Y-STEP: IC1.97 Y.7 | length 45
  Top Layer w0.2: IC1.97@74.81,82.267 74.86,82.217 74.86,81.119 75.516,80.463 87.482,80.463 90.943,83.924 111.04,83.924 111.968,84.852 111.968,87.776
  Top Layer w0.254: Y.7@110.739,89.005 111.968,87.776
Z-DIR: IC1.95 Z.8 | length 57.6
  Top Layer w0.2: IC1.95@73.81,82.267 73.86,82.217 73.86,80.988 75.185,79.663 87.813,79.663 91.274,83.124 122.801,83.124 124.229,84.552 125.404,84.552 125.979,85.128 Z.8@125.979,86.465
Z-EN: IC1.89 R25.2 Z.1 | length 91.8
  Top Layer w0.2: IC1.89@70.81,82.216 70.81,80.549 74.105,77.254 118.062,77.254 124.56,83.752 130.054,83.752 R25.2@134.908,88.606 ; IC1.89@70.81,82.267 IC1.89@70.833,82.244
  Top Layer w0.254: Z.1@125.979,104.245 126.922,104.245 132.474,98.693 132.474,96.356 135.014,93.816 135.014,88.877 R25.2@134.79,88.653
Z-MAX: IC1.58 Z+.1 | length 6.7
  Top Layer w0.254: 57.612,94.738 57.612,93.747 59.047,92.312 62.755,92.312 IC1.58@62.76,92.317
Z-MIN: IC1.57 Z-.1 | length 8
  Top Layer w0.254: 57.612,97.278 58.78,96.11 58.78,94.586 60.599,92.766 61.785,92.766 61.812,92.794 62.783,92.794 IC1.57@62.76,92.817
Z-STEP: IC1.94 Z.7 | length 63.8
  Top Layer w0.2: IC1.94@73.31,82.267 73.36,82.217 73.36,80.922 75.019,79.263 87.979,79.263 91.44,82.724 122.966,82.724 124.394,84.152 126.629,84.152 128.02,85.543 128.02,87.296 Z.7@126.312,89.005
  Top Layer w0.254: Z.7@125.979,89.005 Z.7@126.312,89.005
pads on no net: IC1.8 IC1.9 IC1.14 IC1.23 IC1.27 IC1.28 IC1.29 IC1.47 IC1.48 IC1.49 IC1.65 IC1.66 IC1.67 IC1.68 IC1.69 IC1.79 IC2.5 IC2.6 IC2.7 IC2.12 IC2.13 IC2.18 IC2.19 IC2.20 IC2.21 IC2.22 IC2.23 IC2.25 IC2.26 J2.5 J2.MH1 J2.MH2 JTAG.8 sc1.0 sc2.0 sc3.0 sc4.0

## Polygon pours and split planes (outlines as drawn)
GND on Top Layer "Bottom Layer-No Net" (solid, pour order 1017): 127.385,64.766 127.385,66.417 126.725,67.077 124.261,67.077 124.337,67.077 123.753,66.493 123.753,66.417 123.753,64.766
GND on Top Layer "Bottom Layer-No Net" (solid, pour order 1016): 118.775,64.766 118.775,66.417 118.114,67.077 115.651,67.077 115.727,67.077 115.143,66.493 115.143,66.417 115.143,64.766
GND on Top Layer "Bottom Layer-No Net" (solid, pour order 1015): 110.317,64.664 110.317,66.315 109.656,66.976 107.192,66.976 107.269,66.976 106.684,66.392 106.684,66.315 106.684,64.664
GND on Top Layer "Bottom Layer-No Net" (solid, pour order 1014): 102.138,64.69 102.138,66.341 101.477,67.001 99.014,67.001 99.09,67.001 98.506,66.417 98.506,66.341 98.506,64.69
GND on Top Layer "Bottom Layer-No Net" (solid, pour order 1013): 93.73,64.741 93.73,66.392 93.07,67.052 90.606,67.052 90.682,67.052 90.098,66.468 90.098,66.392 90.098,64.741
GND on Top Layer "Bottom Layer-No Net" (solid, pour order 1012): 181.386,73.935 181.386,75.586 180.725,76.247 178.262,76.247 178.338,76.247 177.754,75.663 177.754,75.586 177.754,73.935
NetFAN1_2 on Top Layer "Bottom Layer-No Net" (solid, pour order 1011): 128.732,49.805 120.68,49.805 120.68,63.471 128.732,63.471
NetFAN0_2 on Top Layer "Bottom Layer-No Net" (solid, pour order 1010): 120.578,49.805 112.272,49.805 112.272,63.471 120.578,63.471
NetHE2_2 on Top Layer "Bottom Layer-No Net" (solid, pour order 1009): 112.12,49.805 103.916,49.805 103.916,63.471 112.12,63.471
NetHE1_2 on Top Layer "Bottom Layer-No Net" (solid, pour order 1008): 103.789,49.805 95.559,49.805 95.559,63.471 103.789,63.471
NetHE0_2 on Top Layer "Bottom Layer-No Net" (solid, pour order 1007): 95.432,49.805 87.431,49.805 87.431,63.445 95.432,63.445
NetHB-OUT_1 on Top Layer "Bottom Layer-No Net" (solid, remove dead copper, pour order 1003): 172.061,72.481 185.85,72.481 185.85,46.86 186.491,46.122 186.01,46.675 171.099,46.675 171.099,72.665 171.259,72.481 173.023,72.481
NetHB-OUT_1 on Bottom Layer "Bottom Layer-No Net" (solid, remove dead copper, pour order 1002): 172.061,72.481 185.85,72.481 185.85,46.86 186.491,46.122 186.01,46.675 171.099,46.675 171.099,72.665 171.259,72.481 173.023,72.481
NetHE0_2 on Bottom Layer "Bottom Layer-No Net" (solid, pour order 1006): 95.331,49.805 87.431,49.805 87.431,63.445 95.331,63.445
NetHE1_2 on Bottom Layer "Bottom Layer-No Net" (solid, pour order 1005): 103.763,49.805 95.534,49.805 95.534,63.471 103.763,63.471
NetHE2_2 on Bottom Layer "Bottom Layer-No Net" (solid, remove dead copper, pour order 1004): 112.171,49.805 104.017,49.805 104.017,63.471 112.171,63.471
GND on Mechanical 1 "Bottom Layer-No Net" (solid, remove dead copper, pour order 1000): 51,117 186,117 186,42 51,42
GND on Mechanical 13 "Bottom Layer-No Net" (solid, remove dead copper, pour order 1001): 51,116.785 186,116.785 186,42 185.906,41.906 50.779,41.906

## Keep-outs
Keep-Out Layer:
  circle w0.254: c54.619,45.868 r3.552
  circle w0.254: c182.275,45.614 r3.552
  circle w0.254: c54.773,113.325 r3.552
  circle w0.254: c182.021,81.225 r3.552
  lines w0.254: 41,42 41,117 186,117 186,42 41,42

## Other copper
Top Layer:
  rectangle net GND: 131.78,42.338 145.038,54.301
Bottom Layer:
  rectangle net GND: 177.093,74.52 182.021,77.161
  rectangle net GND: 89.235,65.246 128.325,67.56

## Silkscreen, mask and mechanical layers (free items; w line width, h text height)
Top Overlay:
  drawing of 161 lines, arcs and shapes, not listed
  text "S" at 47.319,117.531 h1
  text "CL" at 49.439,117.531 h1
  text "+" at 42.239,117.506 h1
  text "-" at 44.804,117.506 h1
  text "v" at 93.273,115.134 h1.52 r270
  text "v" at 74.934,114.982 h1.52 r270
  text "Endstops" at 53.34,107.95 h1 r270
  text "1B" at 127.919,105.228 h1
  text "1A" at 130.484,105.228 h1
  text "2A" at 132.948,105.228 h1
  text "2B" at 135.615,105.228 h1
  text "1B" at 143.006,105.228 h1
  text "1A" at 145.572,105.228 h1
  text "2A" at 148.036,105.228 h1
  text "2B" at 150.703,105.228 h1
  text "1B" at 158.246,105.228 h1
  text "1A" at 160.812,105.228 h1
  text "2A" at 163.276,105.228 h1
  text "2B" at 165.943,105.228 h1
  text "1B" at 112.653,105.203 h1
  text "1A" at 115.219,105.203 h1
  text "2A" at 117.683,105.203 h1
  text "2B" at 120.35,105.203 h1
  text "1B" at 173.461,105.203 h1
  text "1A" at 176.026,105.203 h1
  text "2A" at 178.49,105.203 h1
  text "2B" at 181.157,105.203 h1
  text "1B" at 97.388,105.177 h1
  text "1A" at 99.953,105.177 h1
  text "2A" at 102.417,105.177 h1
  text "2B" at 105.084,105.177 h1
  text "Encoders" at 53.34,99.06 h1 r270
  text "v" at 83.342,96.389 h1.52 r90
  text "alone" at 92.765,96.262 h1 r90
  text "Stand" at 91.283,96.186 h1 r90
  text "T0" at 49.704,84.829 h1
  text "USB" at 91.292,84.019 h1 r90
  text "Power" at 92.587,83.206 h1 r90
  text "v" at 104.602,81.581 h1.52 r270
  text "HB" at 175.722,80.641 h1
  text "1B Black" at 119.156,79.727 h1
  text "T1" at 49.837,79.52 h1
  text "1A Green" at 119.156,78.169 h1
  text "2A Red" at 119.156,76.611 h1
  text "2B Blue" at 119.156,75.053 h1
  text "T2" at 49.882,74.313 h1
  text "v" at 77.754,72.919 h1.52
  text "HE0" at 91.775,71.954 h1
  text "HE1" at 100.03,71.954 h1
  text "HE2" at 107.98,71.954 h1
  text "FAN1" at 124.363,71.954 h1
  text "FAN0" at 115.803,71.929 h1
  text "_" at 83.277,71.047 h1
  text "T3" at 49.831,69.31 h1
  text "+" at 83.277,67.796 h1
  text "_" at 84.739,65.172 h1
  text "THB" at 49.831,64.357 h1
  text "12V-Select" at 129.849,64.156 h1 r90
  text "12V-Select" at 112.704,64.131 h1 r90
  text "12V-Select" at 121.137,64.131 h1 r90
  text "+" at 84.739,61.921 h1
  text "USB" at 54.716,61.845 h1
  text "11A" at 167.06,58.873 h1
  text "5A" at 151.795,57.629 h1
  text "PWR" at 129.849,52.701 h1 r90
  text "PWR" at 112.704,52.65 h1 r90
  text "PWR" at 121.137,52.65 h1 r90
  text "v" at 62.361,50.009 h1.52 r180
  text "_" at 83.012,46.808 h1
  text "12V..35V" at 147.401,44.598 h1 r90
  text "+" at 83.012,43.557 h1
  text "-" at 88.796,42.541 h2
  text "-" at 122.4,42.541 h2
  text "-" at 105.56,42.49 h2
  text "-" at 113.891,42.49 h2
  text "-" at 97.178,42.465 h2
  text "+" at 92.428,42.414 h2
  text "+" at 126.033,42.414 h2
  text "+" at 109.192,42.363 h2
  text "+" at 117.524,42.363 h2
  text "+" at 100.81,42.338 h2
  text "-" at 149.839,42.287 h2
  text "+" at 154.919,42.287 h2
  text "-" at 159.836,42.287 h2
  text "+" at 164.916,42.287 h2
  text "-" at 169.869,42.287 h2
  text "+" at 174.949,42.287 h2
Bottom Overlay:
  lines w0.203: 107.396,68.373 131.602,68.373 ; 107.624,83.486 131.602,83.486
  text "BOARD MODEL" at 131.576,81.759 h1.02
  text "RUMBA" at 131.449,79.803 h1.4
  text "....................................................." at 131.449,78.99 h0.55 r180
  text "OPEN SORCE" at 131.5,76.933 h1.07
  text "3D PRINTER ELECTRONICS" at 131.5,75.307 h1.02
  text "....................................................." at 131.449,74.494 h0.55 r180
  text "WWW.RUMBA.CC" at 131.5,72.513 h1.02
  text "....................................................." at 131.449,71.649 h0.55 r180
  text "MADE IN CHINA" at 131.5,69.465 h1.02
Top Solder:
  text "RUMBA" at 105.872,78.584 h3.7
Bottom Solder:
  text "RUMBA" at 151.195,62.531 h4

## Dimensions
41,117 to 41,42 on Top Overlay
41,117 to 186,117 on Top Overlay

## Text inside footprints (layer, text, board x,y; h text height)
E0: Mechanical 15 "Vmot" at 150.516,103.956 h0.61; Mechanical 15 "GND" at 150.516,101.388 h0.61; Mechanical 15 "2B" at 150.516,98.82 h0.61; Mechanical 15 "2A" at 150.516,96.253 h0.61; Mechanical 15 "1A" at 150.516,93.685 h0.61; Mechanical 15 "1B" at 150.516,91.117 h0.61; Mechanical 15 "VDD" at 150.516,88.549 h0.61; Mechanical 15 "GND" at 150.516,85.981 h0.61; Mechanical 15 "EN" at 142.481,103.866 h0.61; Mechanical 15 "MS1" at 142.481,101.326 h0.61; Mechanical 15 "MS2" at 142.481,98.786 h0.61; Mechanical 15 "MS3" at 142.481,96.246 h0.61; Mechanical 15 "RST" at 142.481,93.706 h0.61; Mechanical 15 "SLP" at 142.481,91.166 h0.61; Mechanical 15 "STEP" at 142.481,88.626 h0.61; Mechanical 15 "DIR" at 142.481,86.086 h0.61
E1: Mechanical 15 "DIR" at 157.721,86.086 h0.61; Mechanical 15 "STEP" at 157.721,88.626 h0.61; Mechanical 15 "SLP" at 157.721,91.166 h0.61; Mechanical 15 "RST" at 157.721,93.706 h0.61; Mechanical 15 "MS3" at 157.721,96.246 h0.61; Mechanical 15 "MS2" at 157.721,98.786 h0.61; Mechanical 15 "MS1" at 157.721,101.326 h0.61; Mechanical 15 "EN" at 157.721,103.866 h0.61; Mechanical 15 "GND" at 165.756,85.981 h0.61; Mechanical 15 "VDD" at 165.756,88.549 h0.61; Mechanical 15 "1B" at 165.756,91.117 h0.61; Mechanical 15 "1A" at 165.756,93.685 h0.61; Mechanical 15 "2A" at 165.756,96.253 h0.61; Mechanical 15 "2B" at 165.756,98.82 h0.61; Mechanical 15 "GND" at 165.756,101.388 h0.61; Mechanical 15 "Vmot" at 165.756,103.956 h0.61
E2: Mechanical 15 "Vmot" at 180.996,103.956 h0.61; Mechanical 15 "GND" at 180.996,101.388 h0.61; Mechanical 15 "2B" at 180.996,98.82 h0.61; Mechanical 15 "2A" at 180.996,96.253 h0.61; Mechanical 15 "1A" at 180.996,93.685 h0.61; Mechanical 15 "1B" at 180.996,91.117 h0.61; Mechanical 15 "VDD" at 180.996,88.549 h0.61; Mechanical 15 "GND" at 180.996,85.981 h0.61; Mechanical 15 "EN" at 172.961,103.866 h0.61; Mechanical 15 "MS1" at 172.961,101.326 h0.61; Mechanical 15 "MS2" at 172.961,98.786 h0.61; Mechanical 15 "MS3" at 172.961,96.246 h0.61; Mechanical 15 "RST" at 172.961,93.706 h0.61; Mechanical 15 "SLP" at 172.961,91.166 h0.61; Mechanical 15 "STEP" at 172.961,88.626 h0.61; Mechanical 15 "DIR" at 172.961,86.086 h0.61
J2: Mechanical 1 "PCB Edge" at 41.446,58.338 h0.25 r270
X: Mechanical 15 "Vmot" at 104.804,103.956 h0.61; Mechanical 15 "GND" at 104.804,101.388 h0.61; Mechanical 15 "2B" at 104.804,98.82 h0.61; Mechanical 15 "2A" at 104.804,96.253 h0.61; Mechanical 15 "1A" at 104.804,93.685 h0.61; Mechanical 15 "1B" at 104.804,91.117 h0.61; Mechanical 15 "VDD" at 104.804,88.549 h0.61; Mechanical 15 "GND" at 104.804,85.981 h0.61; Mechanical 15 "EN" at 96.769,103.866 h0.61; Mechanical 15 "MS1" at 96.769,101.326 h0.61; Mechanical 15 "MS2" at 96.769,98.786 h0.61; Mechanical 15 "MS3" at 96.769,96.246 h0.61; Mechanical 15 "RST" at 96.769,93.706 h0.61; Mechanical 15 "SLP" at 96.769,91.166 h0.61; Mechanical 15 "STEP" at 96.769,88.626 h0.61; Mechanical 15 "DIR" at 96.769,86.086 h0.61
Y: Mechanical 15 "DIR" at 112.009,86.086 h0.61; Mechanical 15 "STEP" at 112.009,88.626 h0.61; Mechanical 15 "SLP" at 112.009,91.166 h0.61; Mechanical 15 "RST" at 112.009,93.706 h0.61; Mechanical 15 "MS3" at 112.009,96.246 h0.61; Mechanical 15 "MS2" at 112.009,98.786 h0.61; Mechanical 15 "MS1" at 112.009,101.326 h0.61; Mechanical 15 "EN" at 112.009,103.866 h0.61; Mechanical 15 "GND" at 120.044,85.981 h0.61; Mechanical 15 "VDD" at 120.044,88.549 h0.61; Mechanical 15 "1B" at 120.044,91.117 h0.61; Mechanical 15 "1A" at 120.044,93.685 h0.61; Mechanical 15 "2A" at 120.044,96.253 h0.61; Mechanical 15 "2B" at 120.044,98.82 h0.61; Mechanical 15 "GND" at 120.044,101.388 h0.61; Mechanical 15 "Vmot" at 120.044,103.956 h0.61
Z: Mechanical 15 "DIR" at 127.249,86.086 h0.61; Mechanical 15 "STEP" at 127.249,88.626 h0.61; Mechanical 15 "SLP" at 127.249,91.166 h0.61; Mechanical 15 "RST" at 127.249,93.706 h0.61; Mechanical 15 "MS3" at 127.249,96.246 h0.61; Mechanical 15 "MS2" at 127.249,98.786 h0.61; Mechanical 15 "MS1" at 127.249,101.326 h0.61; Mechanical 15 "EN" at 127.249,103.866 h0.61; Mechanical 15 "GND" at 135.284,85.981 h0.61; Mechanical 15 "VDD" at 135.284,88.549 h0.61; Mechanical 15 "1B" at 135.284,91.117 h0.61; Mechanical 15 "1A" at 135.284,93.685 h0.61; Mechanical 15 "2A" at 135.284,96.253 h0.61; Mechanical 15 "2B" at 135.284,98.82 h0.61; Mechanical 15 "GND" at 135.284,101.388 h0.61; Mechanical 15 "Vmot" at 135.284,103.956 h0.61